# Altium PCB vi_measurement.PcbDoc
Units mil, origin at the board's own origin, x right, y up, seen from the top; angles counter-clockwise.
Board outline 3939.96 x 3937.01 mil, 2 copper layers (Top Layer, Bottom Layer); 149 components, 116 nets, 385 pads, 242 vias.
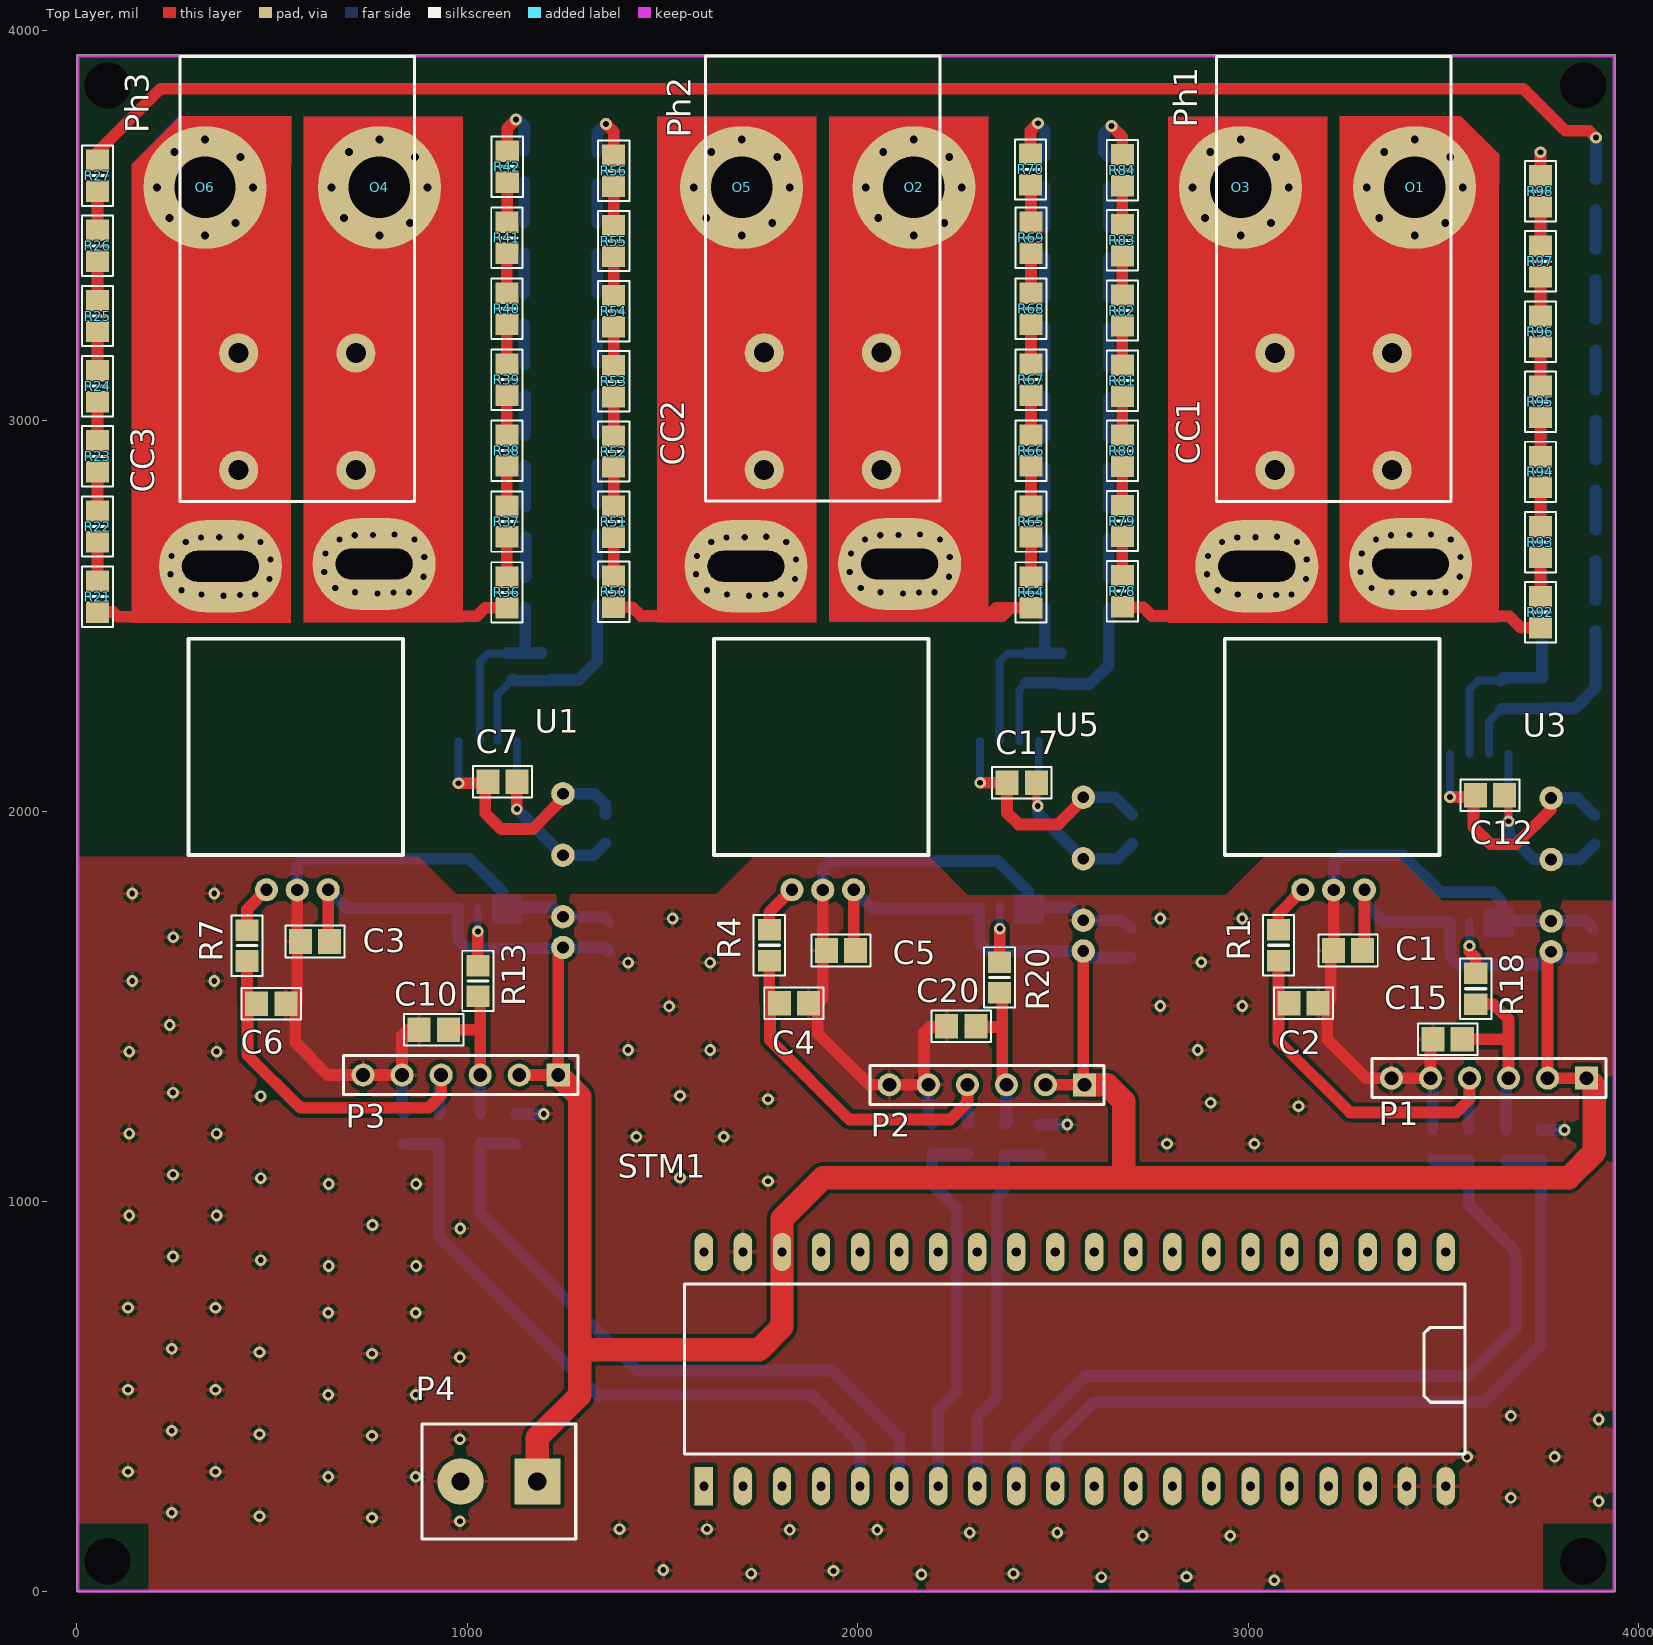
[diagram p0: Top Layer view]
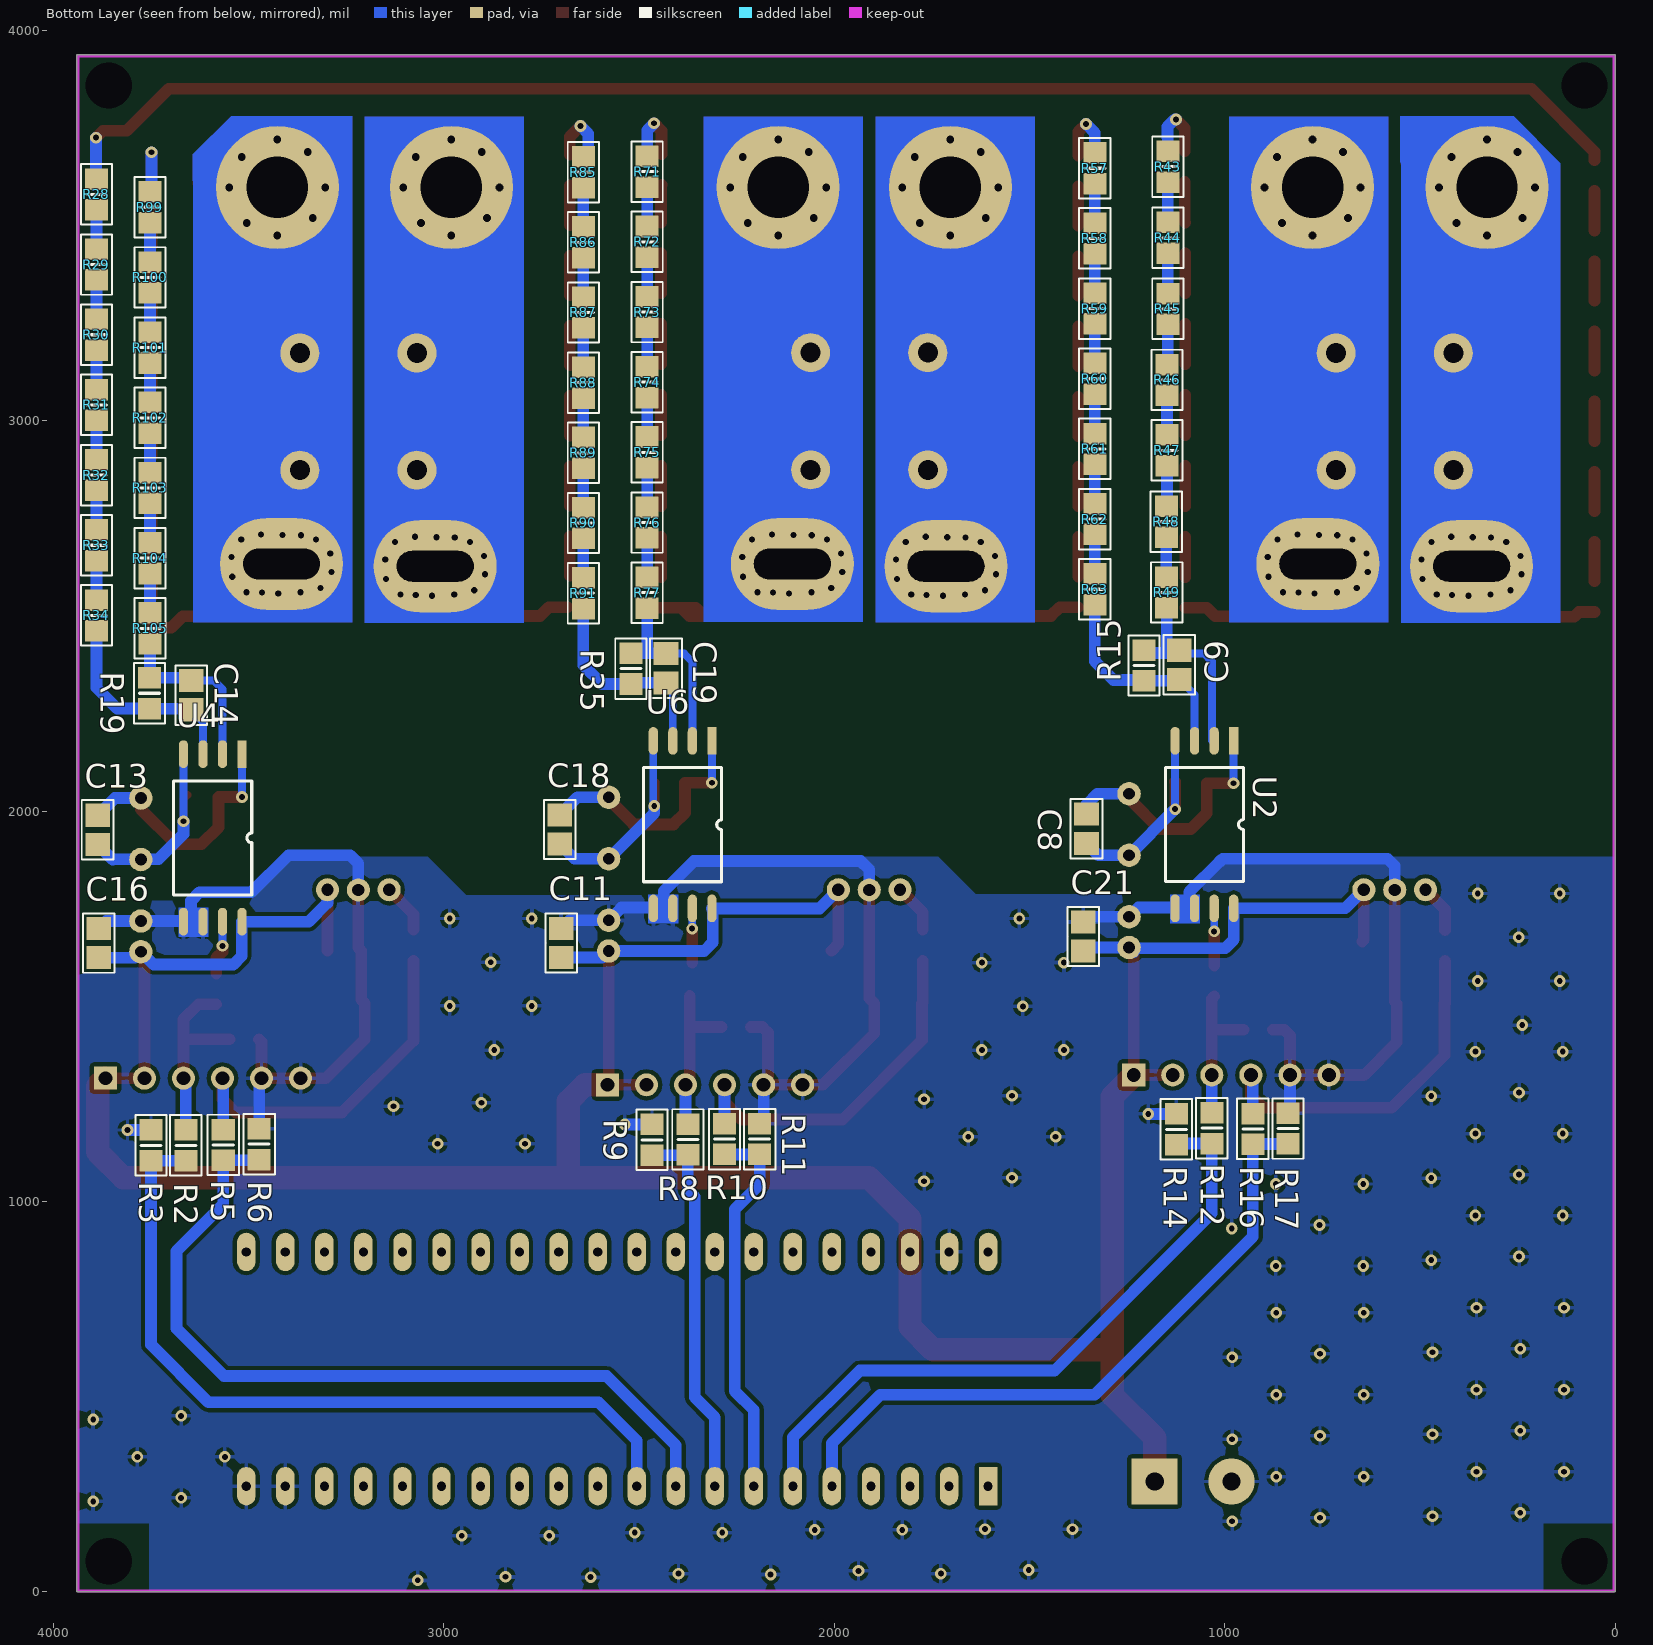
[diagram p1: Bottom Layer view, seen from below]

## Layer stack, top to bottom
Top Solder: solder mask 0.4, Solder Resist, Dk 3.5
Top Layer: signal copper 1.4
Dielectric 1: dielectric 12.6, FR-4, Dk 4.8
Bottom Layer: signal copper 1.4
Bottom Solder: solder mask 0.4, Solder Resist, Dk 3.5

## Board outline
0,0 3939.96,0 3939.96,3937.01 0,3937.01

## Design rules (kind name [scope] priority, off if disabled: settings)
Clearance [All] p1: gap=10 ignorepadtopadclearanceinfootprint=FALSE
PlaneClearance [All] p1: clearance=100
PolygonConnect [All] p1: connectstyle=Relief reliefconductorwidth=10 reliefentries=4 polygonreliefangle="90 Angle" airgapwidth=10
RoutingVias [All] p1: holewidth=28 width=50 viastyle="Through Hole" minholewidth=28 minwidth=50 maxholewidth=28 maxwidth=50
SilkToSilkClearance [All] p1: silktosilkclearance=1
SilkToSolderMaskClearance [IsPad] p1: minsilkscreentomaskgap=1 clearancetoexposedcopper=TRUE
SolderMaskExpansion [All] p1: expansion=4
Width [All] p1: maxlimit=150 minlimit=10 preferedwidth=30
27 further rules are at their usual default settings.

## Components (designator, comment, footprint, x,y, rotation, side; value= is the part's Value field where it differs from the comment)
C1 "" CAPC_0805 3256,1643 r0 top
C2 "" CAPC_0805 3141.69,1507.87 r0 top
C3 "" CAPC_0805 610,1666 r0 top
C4 "" CAPC_0805 1836.57,1507.87 r0 top
C5 "" CAPC_0805 1957,1643 r0 top
C6 "" CAPC_0805 497.99,1506.89 r0 top
C7 "Capacitor SMD" CAPC_0805 1090,2075 r180 top
C8 "Capacitor SMD" CAPC_0805 1354,1955 r90 bottom
C9 "Capacitor SMD" CAPC_0805 1116,2374.6 r270 bottom
C10 "Capacitor SMD" CAPC_0805 914,1440 r0 top
C11 "Capacitor SMD" CAPC_0805 2699,1662.4 r270 bottom
C12 "Capacitor SMD" CAPC_0805 3619.6,2041 r180 top
C13 "Capacitor SMD" CAPC_0805 3887,1952 r90 bottom
C14 "Capacitor SMD" CAPC_0805 3647,2297 r270 bottom
C15 "Capacitor SMD" CAPC_0805 3511,1416 r0 top
C16 "Capacitor SMD" CAPC_0805 3884,1662 r270 bottom
C17 "Capacitor SMD" CAPC_0805 2420,2073 r180 top
C18 "Capacitor SMD" CAPC_0805 2703,1953 r90 bottom
C19 "Capacitor SMD" CAPC_0805 2431,2366 r270 bottom
C20 "Capacitor SMD" CAPC_0805 2265,1449 r0 top
C21 "Capacitor SMD" CAPC_0805 1362,1679 r270 bottom
CC1 "ACS770" ACS770 3219.06,2215.55 r270 top
CC2 "ACS770" ACS770 1910.55,2215.55 r270 top
CC3 "ACS770" ACS770 564.53,2215.55 r270 top
O1 "olhal" Olhal 3426.57,3597.44 r0 top
O2 "olhal" Olhal 2143.66,3597.44 r0 top
O3 "olhal" Olhal 2980.71,3597.44 r0 top
O4 "olhal" Olhal 775,3597.44 r0 top
O5 "olhal" Olhal 1702.72,3597.44 r0 top
O6 "olhal" Olhal 328.15,3597.44 r0 top
P1 "Header 6" HDR1X6 3617,1316 r180 top
P2 "Header 6" HDR1X6 2331,1299 r180 top
P3 "Header 6" HDR1X6 983,1324 r180 top
P4 "gen_purpose_conn_1x2" connector1x2_parafuso 1081,283 r180 top
Ph1 "Phase" Phoenix 3069.06,3173.23 r0 top
Ph2 "Phase" Phoenix 1760.55,3174.21 r0 top
Ph3 "Phase" Phoenix 414.53,3173.23 r0 top
R1 "Resistor" RESC_0805 3077.72,1656.5 r270 top
R2 "Resistor" RESC_0805 3661,1144 r90 bottom
R3 "Resistor" RESC_0805 3750,1144 r270 bottom
R4 "Resistor" RESC_0805 1773.58,1656.5 r270 top
R5 "Resistor" RESC_0805 3565,1145 r90 bottom
R6 "Resistor" RESC_0805 3473,1147 r270 bottom
R7 "Resistor" RESC_0805 435.98,1655.51 r270 top
R8 "Resistor" RESC_0805 2375,1159 r90 bottom
R9 "Resistor" RESC_0805 2467,1158 r270 bottom
R10 "Resistor" RESC_0805 2281,1160 r90 bottom
R11 "Resistor" RESC_0805 2191,1160 r270 bottom
R12 "Resistor" RESC_0805 1033,1188 r90 bottom
R13 "Resistor" RESC_0805 1027,1565 r270 top
R14 "Resistor" RESC_0805 1124,1185 r270 bottom
R15 "R_MEAS" RESC_0805 1207,2373 r270 bottom
R16 "Resistor" RESC_0805 928,1186 r90 bottom
R17 "Resistor" RESC_0805 838,1187 r270 bottom
R18 "Resistor" RESC_0805 3583,1545 r270 top
R19 "R_MEAS" RESC_0805 3754,2302 r270 bottom
R20 "Resistor" RESC_0805 2363,1574 r270 top
R21 "Resistor" RESC_0805 53,2549.28 r90 top
R22 "Resistor" RESC_0805 53,2729.01 r90 top
R23 "Resistor" RESC_0805 53,2908.73 r90 top
R24 "Resistor" RESC_0805 53,3088.46 r90 top
R25 "Resistor" RESC_0805 53,3268.18 r90 top
R26 "Resistor" RESC_0805 53,3447.91 r90 top
R27 "Resistor" RESC_0805 53,3627.63 r90 top
R28 "Resistor" RESC_0805 3889.76,3579.65 r270 bottom
R29 "Resistor" RESC_0805 3889.76,3399.93 r270 bottom
R30 "Resistor" RESC_0805 3889.76,3220.2 r270 bottom
R31 "Resistor" RESC_0805 3889.76,3040.48 r270 bottom
R32 "Resistor" RESC_0805 3889.76,2860.76 r270 bottom
R33 "Resistor" RESC_0805 3889.76,2681.03 r270 bottom
R34 "Resistor" RESC_0805 3889.76,2501.31 r270 bottom
R35 "R_MEAS" RESC_0805 2521,2365 r270 bottom
R36 "Resistor" RESC_0805 1101.34,2560.04 r90 top
R37 "Resistor" RESC_0805 1101.34,2741.73 r90 top
R38 "Resistor" RESC_0805 1101.34,2923.42 r90 top
R39 "Resistor" RESC_0805 1101.34,3105.12 r90 top
R40 "Resistor" RESC_0805 1101.34,3286.81 r90 top
R41 "Resistor" RESC_0805 1101.34,3468.5 r90 top
R42 "Resistor" RESC_0805 1102.32,3650.59 r90 top
R43 "Resistor" RESC_0805 1145.63,3650.59 r270 bottom
R44 "Resistor" RESC_0805 1145.63,3468.5 r270 bottom
R45 "Resistor" RESC_0805 1145.63,3286.42 r270 bottom
R46 "Resistor" RESC_0805 1147.6,3104.33 r270 bottom
R47 "Resistor" RESC_0805 1147.6,2924.21 r270 bottom
R48 "Resistor" RESC_0805 1149.57,2741.14 r270 bottom
R49 "Resistor" RESC_0805 1148.58,2560.04 r270 bottom
R50 "Resistor" RESC_0805 1375,2561.65 r90 top
R51 "Resistor" RESC_0805 1375,2741.38 r90 top
R52 "Resistor" RESC_0805 1375,2921.1 r90 top
R53 "Resistor" RESC_0805 1375,3100.83 r90 top
R54 "Resistor" RESC_0805 1375,3280.55 r90 top
R55 "Resistor" RESC_0805 1375,3460.28 r90 top
R56 "Resistor" RESC_0805 1375,3640 r90 top
R57 "Resistor" RESC_0805 1332.76,3646.65 r270 bottom
R58 "Resistor" RESC_0805 1332.76,3466.93 r270 bottom
R59 "Resistor" RESC_0805 1332.76,3287.2 r270 bottom
R60 "Resistor" RESC_0805 1332.76,3107.48 r270 bottom
R61 "Resistor" RESC_0805 1332.76,2927.76 r270 bottom
R62 "Resistor" RESC_0805 1332.76,2748.03 r270 bottom
R63 "Resistor" RESC_0805 1332.76,2568.31 r270 bottom
R64 "Resistor" RESC_0805 2443.86,2560.04 r90 top
R65 "Resistor" RESC_0805 2443.86,2741.73 r90 top
R66 "Resistor" RESC_0805 2443.86,2923.43 r90 top
R67 "Resistor" RESC_0805 2443.86,3105.12 r90 top
R68 "Resistor" RESC_0805 2443.86,3286.81 r90 top
R69 "Resistor" RESC_0805 2443.86,3468.5 r90 top
R70 "Resistor" RESC_0805 2442.71,3643.47 r90 top
R71 "Resistor" RESC_0805 2479.29,3637.8 r270 bottom
R72 "Resistor" RESC_0805 2479.29,3458.07 r270 bottom
R73 "Resistor" RESC_0805 2479.29,3278.35 r270 bottom
R74 "Resistor" RESC_0805 2479.29,3098.62 r270 bottom
R75 "Resistor" RESC_0805 2479.29,2918.9 r270 bottom
R76 "Resistor" RESC_0805 2479.29,2739.17 r270 bottom
R77 "Resistor" RESC_0805 2479.29,2559.45 r270 bottom
R78 "Resistor" RESC_0805 2677.76,2563.35 r90 top
R79 "Resistor" RESC_0805 2677.76,2743.07 r90 top
R80 "Resistor" RESC_0805 2677.76,2922.8 r90 top
R81 "Resistor" RESC_0805 2677.76,3102.52 r90 top
R82 "Resistor" RESC_0805 2677.76,3282.24 r90 top
R83 "Resistor" RESC_0805 2677.76,3461.97 r90 top
R84 "Resistor" RESC_0805 2677.76,3641.69 r90 top
R85 "Resistor" RESC_0805 2642.76,3636.65 r270 bottom
R86 "Resistor" RESC_0805 2642.76,3456.93 r270 bottom
R87 "Resistor" RESC_0805 2642.76,3277.2 r270 bottom
R88 "Resistor" RESC_0805 2642.76,3097.48 r270 bottom
R89 "Resistor" RESC_0805 2642.76,2917.76 r270 bottom
R90 "Resistor" RESC_0805 2642.76,2738.03 r270 bottom
R91 "Resistor" RESC_0805 2642.76,2558.31 r270 bottom
R92 "Resistor" RESC_0805 3748.76,2509.35 r90 top
R93 "Resistor" RESC_0805 3748.76,2689.07 r90 top
R94 "Resistor" RESC_0805 3748.76,2868.8 r90 top
R95 "Resistor" RESC_0805 3748.76,3048.52 r90 top
R96 "Resistor" RESC_0805 3748.76,3228.24 r90 top
R97 "Resistor" RESC_0805 3748.76,3407.97 r90 top
R98 "Resistor" RESC_0805 3748.76,3587.69 r90 top
R99 "Resistor" RESC_0805 3752.76,3546.65 r270 bottom
R100 "Resistor" RESC_0805 3752.76,3366.93 r270 bottom
R101 "Resistor" RESC_0805 3752.76,3187.2 r270 bottom
R102 "Resistor" RESC_0805 3752.76,3007.48 r270 bottom
R103 "Resistor" RESC_0805 3752.76,2827.76 r270 bottom
R104 "Resistor" RESC_0805 3752.76,2648.03 r270 bottom
R105 "Resistor" RESC_0805 3752.76,2468.31 r270 bottom
STM1 "stm32" STM32 1606,271 r90 top
U1 "DC/DC_ISO" DC/DC_ISO 1245,1650.78 r90 top
U2 "AMC1200" SOIC8 977,2180.13 r270 bottom
U3 "DC/DC_ISO" DC/DC_ISO 3776,1639.78 r90 top
U4 "AMC1200" SOIC8 3517,2146 r270 bottom
U5 "DC/DC_ISO" DC/DC_ISO 2578,1641.78 r90 top
U6 "AMC1200" SOIC8 2313.5,2180 r270 bottom

## Footprints (in the part's own frame and the unit in brackets; to place one, negate y for a bottom-side part, rotate by r counter-clockwise, add the part's x,y. Pads: shape width x height; smd on the part's side, far side on the other; paste and mask are expansions set on the pad)
ACS770 [mm] "Connector; Header; 3 Position"
  round 1.5 hole 0.8: 1(10.592,2.007) 2(10.604,-0.002) 3(10.592,-2.007)
  oval 6x8 hole 2 slot 5 at 90 deg: 4(-10.605,5.002) 5(-10.456,-5.002)
  silkscreen extent -5.74,-7.09 8.33,6.88, body extent -11.23,-7.13 11.52,6.87, height 7.1
CAPC_0805 [mm] "Chip Capacitor, Body 2.0x1.3mm, IPC Low Density"
  rect 1.5x1.6 smd: 1(-0.95,0) 2(0.95,0)
  silkscreen extent -1.93,-1.03 1.93,1.03, body extent -1.1,-0.72 1.1,0.72, height 1.1
connector1x2_parafuso [mm] "Connector; Header; 2 Position"
  rect 3x3 hole 1.2: 1(-2.5,0)
  round 3 hole 1.2: 2(2.5,0)
  silkscreen extent -5,-3.75 5,3.75, body extent -4.92,-4.53 5.68,4.47, height 14.6
DC/DC_ISO [mil]
  round 60 hole 30: 1(0,0) 2(78.74,0) 3(236.22,0) 4(393.7,0)
  body extent -60,-150 517,81, height 315
HDR1X6 [mm] "Connector; Header; 6 Position"
  rect 1.5x1.5 hole 0.9: 1(-6.35,0)
  round 1.5 hole 0.9: 2(-3.81,0) 3(-1.27,0) 4(1.27,0) 5(3.81,0) 6(6.35,0)
  silkscreen extent -7.62,-1.27 7.62,1.27
Olhal [mm]
  round 8 hole 4 unplated: 1(0,0)
Phoenix [mm]
  round 2.54 hole 1.3: 1(0,-7.62) 1(0,0) 2(7.62,-7.62) 2(7.62,0)
  silkscreen extent -3.81,-9.65 11.43,19.3, body extent -3.79,-9.65 11.43,19.35, height 15.25
RESC_0805 [mm] "Chip Resistor, Body 2.0x1.3mm, IPC Low Density"
  rect 1.4x1.5 smd: 1(-1,0) 2(1,0)
  silkscreen extent -1.96,-1.01 1.96,1.01, body extent -1.07,-0.7 1.08,0.7, height 0.65
SOIC8 [mm]
  rect 1.8x0.6 smd: 1(0,0)
  oval 1.8x0.6 smd: 2(0,-1.27) 3(0,-2.54) 4(0,-3.81) 5(10.9,-3.81) 6(10.9,-2.54) 7(10.9,-1.27) 8(10.9,0)
  silkscreen extent 1.73,-4.45 9.17,0.63, body extent 1.7,-4.52 9.22,0.69, height 3
STM32 [mm]
  rect 2.5x1.2 hole 0.6: 1(0,0)
  oval 2.5x1.2 hole 0.6: 2(0,-2.54) 3(0,-5.08) 4(0,-7.62) 5(0,-10.16) 6(0,-12.7) 7(0,-15.24) 8(0,-17.78) 9(0,-20.32) 10(0,-22.86) 11(0,-25.4) 12(0,-27.94) 13(0,-30.48) 14(0,-33.02) 15(0,-35.56) 16(0,-38.1) 17(0,-40.64) 18(0,-43.18) 19(0,-45.72) 20(0,-48.26) 21(15.24,-48.26) 22(15.24,-45.72) 23(15.24,-43.18) 24(15.24,-40.64) 25(15.24,-38.1) 26(15.24,-35.56) 27(15.24,-33.02) 28(15.24,-30.48) 29(15.24,-27.94) 30(15.24,-25.4) 31(15.24,-22.86) 32(15.24,-20.32) 33(15.24,-17.78) 34(15.24,-15.24) 35(15.24,-12.7) 36(15.24,-10.16) 37(15.24,-7.62) 38(15.24,-5.08) 39(15.24,-2.54) 40(15.24,0)
  silkscreen extent 2.08,-49.53 13.16,1.27, body extent -3.7,-51.94 19.3,5.86, height 13.1

## Part data
C1 C3 C5: library part "Capacitor SMD", "10uF", LCSC=C337995
C2 C4 C6: library part "Capacitor SMD", "1uF", LCSC=C282734
C7 C8 C11 C12 C13 C16 C17 C18 C21: "10uF", LCSC=C337995
C9 C10 C14 C15 C19 C20: "1uF", LCSC=C282734
P1 P2 P3: "Header, 6-Pin", LatestRevisionDate=17-Jul-2002, LatestRevisionNote="Re-released for DXP Platform.", Publisher="Altium Limited"
Ph1 Ph2 Ph3: library part Phoenix
R1 R4 R7 R13 R18 R20: "330R", LCSC=C269732
R2 R5 R8 R10 R12 R16: "5K", LCSC=C105427
R3 R6 R9 R11 R14 R17 R21 R36 R37 R38 R39 R40 R41 R42 R43 R44 R45 R46 R47 R48 R49 R50 R51 R52 R53 R54 R55 R56 R57 R58 R59 R60 R61 R62 R63 R64 R65 R66 R67 R68 R69 R70 R71 R72 R73 R74 R75 R76 R77 R78 R79 R80 R81 R82 R83 R84 R85 R86 R87 R88 R89 R90 R91 R92 R93 R94 R95 R96 R97 R98 R99 R100 R101 R102 R103 R104 R105: "7K5", LCSC=C294739
R15 R19 R35: library part Resistor, "200R"
U1 U3 U5: LCSC=C98815
U2 U4 U6: LCSC=C79905

## Free pads (board coordinates)
  round 60 hole 118.11 unplated: 4(78.74,78.74) 4(78.74,3858.27) 4(3858.27,3858.27) 4(3858.27,78.74)

## Via types
v1: diameter 30, hole 15, Top Layer to Bottom Layer, 110 vias
v2: diameter 31.5, hole 15.75, Top Layer to Bottom Layer, 84 vias
v3: diameter 23.62, hole 19.68, Top Layer to Bottom Layer, 48 vias

## Nets (pads, with @x,y where several pads share a name; then routed paths per layer and width w, separated by ;. In a path a pad name is that pad's centre, name@x,y a point inside that pad or via, vN(x,y) a via of type N, cw(c..) or ccw(c..) an arc to the next point about the centre after c; other vN are vias at no path point)
A0: R16.1 R17.2 STM1.5 | length 1734.2
  Bottom Layer w30: R17.2 927,1147.63 R16.1 928,910 1333,505 1882,505 2006,381 STM1.5
A1: R12.1 R14.2 STM1.6 | length 1706.6
  Bottom Layer w30: R14.2 1121,1148.63 R12.1 1033,970 1436,567 1935,567 2106,396 STM1.6
A2: R10.1 R11.2 STM1.7 | length 986.1
  Bottom Layer w30: STM1.7 2206,466 2254.62,514.62 2254.62,980.38 2191,1044 R11.2 R10.1
A3: R8.1 R9.2 STM1.8 | length 969.6
  Bottom Layer w30: STM1.8 2306,447 2357.38,498.38 2357.38,1012.38 2375,1030 R8.1 2376,1118.63 R9.2
A4: R5.1 R6.2 STM1.9 | length 2081
  Bottom Layer w30: STM1.9 2406,376 2583,553 3563,553 3685,675 3685,873 3565,993 R5.1 3475,1105.63 R6.2
A5: R2.1 R3.2 STM1.10 | length 2023.1
  Bottom Layer w30: STM1.10 2506,388 2604,486 3603,486 3750,633 R3.2 R2.1
GND: C1.1 C2.2 C3.1 C4.2 C5.1 C6.2 C10.1 C11.1 C15.1 C16.1 C20.1 C21.1 CC1.2 CC2.2 CC3.2 P1.5 P1.6 P2.5 P2.6 P3.5 P3.6 P4.2 R3.1 R6.1 R9.1 R11.1 R14.1 R17.1 STM1.19 STM1.20 STM1.39 U1.2 U2.5 U2.6 U3.2 U4.5 U4.6 U5.2 U6.5 U6.6 | length 5828.3
  Top Layer w30: CC3.2 564.45,1512.33 559.02,1506.89 559.02,1407.98 643,1324 P3.6 P3.5 833,1426 847,1440 C10.1 ; CC2.2 1910.48,1520.75 1897.6,1507.87 1897.6,1430.4 2029,1299 P2.6 P2.5@2170,1299 ; P2.5 P2.5@2170,1299 ; C20.1@2213.6,1447 2184,1447 2170,1433 P2.5@2170,1299 ; CC1.2 3218.98,1650.12 3211.57,1642.72 3211.57,1516.73 3202.72,1507.87 3202.72,1415.28 3302,1316 P1.6 P1.5 3467,1409.4 C15.1
  Bottom Layer w30: CC3.2 564.45,1859.45 583,1878 1005,1878 1011,1872 1012,1872 1091,1793 1091,1763 1101,1753 1221.52,1753 U1.2 1348.88,1729.52 C21.1 ; P3.5 833,1231.37 R17.1 ; R14.1 v1(1195.63,1224.37) ; CC2.2 1910.48,1850.48 1932,1872 2360,1872 2437,1795 2437,1753 2545,1753 2577.48,1720.52 U5.2 2678.28,1720.52 C11.1 ; P2.5 2181,1209.37 R11.1 ; R9.1 v1(2536.63,1197.37) ; CC1.2 3218.98,1865.98 3240,1887 3398,1887 3493,1792 3626,1792 3647.52,1770.48 3647.52,1718.52 U3.2 3864.88,1718.52 C16.1 ; P1.5 3473,1310 R6.1 ; R3.1 v1(3810.37,1183.37)
  other v1: 3067,30 2624,38 2842,39 2163,45 1727,47 2399,47 1938,54 1502,56 2730,144 2954,144 2287,152 2511,152 1826,159 2050,159 1390,161 1614,161 981,181 756,190 468,194 243,203 3898,232 3673,241 644,295 868,295 131,308 355,308 3561,346 3785,346 981,391 756,400 468,404 243,413 3898,442 3673,451 644,505 868,505 131,518 355,518 981,601 756,610 468,614 243,623 644,715 868,715 131,728 355,728 645,835 869,835 471,850 246,859 982,931 757,940 134,964 358,964 645,1045 869,1045 1770,1052 471,1060 1545,1061 246,1069 2792,1148 3016,1148 1433,1166 1657,1166 134,1174 358,1174 3129,1244 2904,1253 1770,1262 471,1270 1545,1271 246,1279 134,1384 358,1384 1412,1388 1622,1388 2871,1388 238,1452 1517,1500 2775,1501 2985,1501 142,1565 352,1565 1412,1612 1622,1612 2880,1613 247,1677 1526,1725 2775,1725 2985,1725 142,1789 352,1789
Gnd1: C7.1 C8.1 U1.3 U2.4 | length 533.9
  Top Layer w30: v1(1127,2005) 1127,2074.6 C7.1
  Bottom Layer w20: U2.4 v1(1127,2005) v1@1130,2002
  Bottom Layer w30: v1@1130,2002 U1.3 1323.4,1887 C8.1
Gnd2: C12.1 C13.1 U3.3 U4.4 | length 539.1
  Top Layer w20: C12.1 3667,2031 v1(3667,1974)
  Bottom Layer w20: v1(3667,1974) U4.4
  Bottom Layer w30: v1(3667,1974) 3667,1941 3731,1877 3775,1877 U3.3 ; U3.3@3776.01,1876.7 3848.4,1876 C13.1
Gnd3: C17.1 C18.1 U5.3 U6.4 | length 553.6
  Top Layer w20: C17.1 2457.4,2016.6 v1(2461,2013)
  Bottom Layer w20: v1(2461,2013) 2463.5,2015.5 U6.4
  Bottom Layer w30: v1(2461,2013) 2461,1995 U5.3 2665.4,1878 C18.1
Iout1: C2.1 P1.4 R1.2 R5.2 | length 971.6
  Top Layer w30: R1.2 3077.72,1411.28 3261,1228 3533,1228 3567,1262 P1.4
  Bottom Layer w30: R5.2 3565,1314 P1.4
Iout2: C4.1 P2.4 R4.2 R10.2 | length 957.1
  Top Layer w30: R4.2 1773.58,1509.84 1775.55,1507.87 1775.55,1413.45 1979,1210 2237,1210 2281,1254 P2.4
  Bottom Layer w30: R10.2 P2.4
Iout3: C6.1 P3.4 R7.2 R16.2 | length 959.4
  Top Layer w30: R7.2 435.98,1507.87 436.97,1506.89 436.97,1375.03 572,1240 901,1240 933,1272 P3.4
  Bottom Layer w30: R16.2 928,1319 P3.4
NetCC1_3: CC1.3 R1.1 | length 128.5
  Top Layer w30: R1.1 3077.72,1736.21 CC1.3
NetCC2_3: CC2.3 R4.1 | length 126.7
  Top Layer w30: R4.1 1773.58,1740.58 CC2.3
NetCC3_3: CC3.3 R7.1 | length 124.2
  Top Layer w30: R7.1 435.98,1749.01 CC3.3
NetLabel7: CC3.5 O6.1 Ph3.1 R21.1 | length 125.9
  Top Layer w30: R21.1 93.09,2509.91 105,2498 174,2498
  other v2: 375.75,2551.63 318.75,2554.63 417.45,2553.78 456.75,2554.63 267.75,2565.63 493.75,2594.63 239.75,2606.63 495.75,2644.63 242.75,2653.63 278.75,2689.63 470.75,2689.63 317.75,2700.63 364.75,2701.63 419.75,2702.63
  other v3: 328.15,3474.44 406.15,3506.44 237.15,3519.44 205.15,3597.44 451.15,3597.44 419.15,3675.44 250.15,3688.44 328.15,3720.44
NetLabel8: CC3.4 O4.1 Ph3.2 R36.1 | length 160.5
  Top Layer w30: 949.76,2499.02 1024.57,2499.02 1046.22,2520.67 R36.1
  other v2: 769.6,2557.48 811.3,2559.63 712.6,2560.48 850.6,2560.48 661.6,2571.48 887.6,2600.48 633.6,2612.48 889.6,2650.48 636.6,2659.48 672.6,2695.48 864.6,2695.48 711.6,2706.48 758.6,2707.48 813.6,2708.48
  other v3: 775,3474.44 853,3506.44 684,3519.44 652,3597.44 898,3597.44 866,3675.44 697,3688.44 775,3720.44
NetLabel9: CC2.5 O5.1 Ph2.1 R50.1 | length 179.2
  Top Layer w30: R50.1 1422.72,2522.28 1445,2500 1545,2500
  other v2: 1721.78,2551.63 1664.78,2554.63 1763.48,2553.78 1802.78,2554.63 1613.78,2565.63 1839.78,2594.63 1585.78,2606.63 1841.78,2644.63 1588.78,2653.63 1624.78,2689.63 1816.78,2689.63 1663.78,2700.63 1710.78,2701.63 1765.78,2702.63
  other v3: 1702.72,3474.44 1780.72,3506.44 1611.72,3519.44 1579.72,3597.44 1825.72,3597.44 1793.72,3675.44 1624.72,3688.44 1702.72,3720.44
NetLabel10: CC2.4 O2.1 Ph2.2 R64.1 | length 321.1
  Top Layer w30: 2258.27,2499.02 2333.07,2499.02 2354.72,2520.67 2409.84,2520.67 ; 2295.79,2499.02 2370.59,2499.02 2392.24,2520.67 R64.1@2447.36,2520.67
  other v2: 2115.63,2557.48 2157.33,2559.63 2058.63,2560.48 2196.63,2560.48 2007.63,2571.48 2233.63,2600.48 1979.63,2612.48 2235.63,2650.48 1982.63,2659.48 2018.63,2695.48 2210.63,2695.48 2057.63,2706.48 2104.63,2707.48 2159.63,2708.48
  other v3: 2143.66,3474.44 2221.66,3506.44 2052.66,3519.44 2020.66,3597.44 2266.66,3597.44 2234.66,3675.44 2065.66,3688.44 2143.66,3720.44
NetLabel11: CC1.5 O3.1 Ph1.1 R78.1 | length 179.2
  Top Layer w30: R78.1@2683.5,2522.28 2731.22,2522.28 2753.5,2500 2853.5,2500
  other v2: 3030.28,2551.63 2973.28,2554.63 3071.98,2553.78 3111.28,2554.63 2922.28,2565.63 3148.28,2594.63 2894.28,2606.63 3150.28,2644.63 2897.28,2653.63 2933.28,2689.63 3125.28,2689.63 2972.28,2700.63 3019.28,2701.63 3074.28,2702.63
  other v3: 2980.71,3474.44 3058.71,3506.44 2889.71,3519.44 2857.71,3597.44 3103.71,3597.44 3071.71,3675.44 2902.71,3688.44 2980.71,3720.44
NetLabel12: CC1.4 O1.1 Ph1.2 R92.1 | length 147.8
  Top Layer w30: 3613,2499 3669,2499 3698.02,2469.98 R92.1
  other v2: 3424.13,2557.48 3465.83,2559.63 3367.13,2560.48 3505.13,2560.48 3316.13,2571.48 3542.13,2600.48 3288.13,2612.48 3544.13,2650.48 3291.13,2659.48 3327.13,2695.48 3519.13,2695.48 3366.13,2706.48 3413.13,2707.48 3468.13,2708.48
  other v3: 3426.57,3474.44 3504.57,3506.44 3335.57,3519.44 3303.57,3597.44 3549.57,3597.44 3517.57,3675.44 3348.57,3688.44 3426.57,3720.44
NetR13_1: R13.1 U2.7 | length 146.6
  Top Layer w30: R13.1 v1(1027,1692)
  Bottom Layer w20: v1(1027,1692) U2.7
NetR18_1: R18.1 U4.7 | length 139.1
  Top Layer w30: v1(3567,1655) 3567,1640 3583,1624 R18.1
  Bottom Layer w20: v1(3567,1655) U4.7
NetR20_1: R20.1 U6.7 | length 146.6
  Top Layer w30: R20.1@2364,1611.37 v1(2364,1699)
  Bottom Layer w20: v1(2364,1699) U6.7@2364,1758
NetR21_2: R21.2 R22.1 | length 101
  Top Layer w30: R21.2 R22.1
NetR22_2: R22.2 R23.1 | length 101
  Top Layer w30: R22.2 R23.1
NetR23_2: R23.2 R24.1 | length 101
  Top Layer w30: R23.2 R24.1
NetR24_2: R24.2 R25.1 | length 101
  Top Layer w30: R24.2 R25.1
NetR25_2: R25.2 R26.1 | length 101
  Top Layer w30: R25.2 R26.1
NetR26_2: R26.2 R27.1 | length 101
  Top Layer w30: R26.2 R27.1
NetR27_2: R27.2 R28.1 | length 4084.9
  Top Layer w30: R27.2 53,3688.82 214.18,3850 3705,3850 3812,3743 3873,3743 v1(3891,3725)
  Bottom Layer w30: R28.1 3891,3620.27 v1(3891,3725)
NetR28_2: R28.2 R29.1 | length 101
  Bottom Layer w30: R29.1 R28.2
NetR29_2: R29.2 R30.1 | length 101
  Bottom Layer w30: R30.1 R29.2
NetR30_2: R30.2 R31.1 | length 101
  Bottom Layer w30: R31.1 R30.2
NetR31_2: R31.2 R32.1 | length 101
  Bottom Layer w30: R32.1 R31.2
NetR32_2: R32.2 R33.1 | length 101
  Bottom Layer w30: R33.1 R32.2
NetR33_2: R33.2 R34.1 | length 101
  Bottom Layer w30: R34.1 R33.2
NetR36_2: R36.2 R37.1 | length 103
  Top Layer w30: R36.2 R37.1
NetR37_2: R37.2 R38.1 | length 103
  Top Layer w30: R37.2 R38.1
NetR38_2: R38.2 R39.1 | length 103
  Top Layer w30: R38.2 R39.1
NetR39_2: R39.2 R40.1 | length 103
  Top Layer w30: R39.2 R40.1
NetR40_2: R40.2 R41.1 | length 103
  Top Layer w30: R40.2 R41.1
NetR41_2: R41.2 R42.1 | length 103.8
  Top Layer w30: R41.2 1102.32,3508.86 R42.1
NetR42_2: R42.2 R43.1 | length 183.5
  Top Layer w30: R42.2 1102.32,3749.02 v1(1124.96,3771.65)
  Bottom Layer w30: v1(1124.96,3771.65) 1127.91,3771.65 1146.61,3752.95 R43.1
NetR43_2: R43.2 R44.1 | length 103.3
  Bottom Layer w30: R44.1 R43.2
NetR44_2: R44.2 R45.1 | length 103.3
  Bottom Layer w30: R45.1 R44.2
NetR45_2: R45.2 R46.1 | length 104.2
  Bottom Layer w30: R45.2 1145.63,3145.67 R46.1
NetR46_2: R46.2 R47.1 | length 101.4
  Bottom Layer w30: R47.1 R46.2
NetR47_2: R47.2 R48.1 | length 105.1
  Bottom Layer w30: R47.2 1147.6,2782.48 R48.1
NetR48_2: R48.2 R49.1 | length 102.8
  Bottom Layer w30: R49.1 1149.57,2600.39 R48.2
NetR50_2: R50.2 R51.1 | length 101
  Top Layer w30: R50.2 R51.1
NetR51_2: R51.2 R52.1 | length 101
  Top Layer w30: R51.2 R52.1
NetR52_2: R52.2 R53.1 | length 101
  Top Layer w30: R52.2 R53.1
NetR53_2: R53.2 R54.1 | length 101
  Top Layer w30: R53.2 R54.1
NetR54_2: R54.2 R55.1 | length 101
  Top Layer w30: R54.2 R55.1
NetR55_2: R55.2 R56.1 | length 101
  Top Layer w30: R55.2 R56.1
NetR56_2: R56.2 R57.1 | length 172.1
  Top Layer w30: v1(1355,3760) 1375,3740 R56.2
  Bottom Layer w30: R57.1 1332.76,3737.76 v1(1355,3760)
NetR57_2: R57.2 R58.1 | length 101
  Bottom Layer w30: R58.1 R57.2
NetR58_2: R58.2 R59.1 | length 101
  Bottom Layer w30: R59.1 R58.2
NetR59_2: R59.2 R60.1 | length 101
  Bottom Layer w30: R60.1 R59.2
NetR60_2: R60.2 R61.1 | length 101
  Bottom Layer w30: R61.1 R60.2
NetR61_2: R61.2 R62.1 | length 101
  Bottom Layer w30: R62.1 R61.2
NetR62_2: R62.2 R63.1 | length 101
  Bottom Layer w30: R63.1 R62.2
NetR64_2: R64.2 R65.1 | length 103
  Top Layer w30: R64.2 R65.1
NetR65_2: R65.2 R66.1 | length 103
  Top Layer w30: R65.2 R66.1
NetR66_2: R66.2 R67.1 | length 103
  Top Layer w30: R66.2 R67.1
NetR67_2: R67.2 R68.1 | length 103
  Top Layer w30: R67.2 R68.1
NetR68_2: R68.2 R69.1 | length 103
  Top Layer w30: R68.2 R69.1
NetR69_2: R69.2 R70.1 | length 96.7
  Top Layer w30: R70.1 2443.86,3602.95 R69.2
NetR70_2: R70.2 R71.1 | length 187.4
  Top Layer w30: R70.2@2448.78,3688.91 R70.2 2442.71,3742.94 v1(2461.57,3761.81)
  Bottom Layer w30: v1(2461.57,3761.81) 2479.29,3744.09 R71.1
NetR71_2: R71.2 R72.1 | length 101
  Bottom Layer w30: R72.1 R71.2
NetR72_2: R72.2 R73.1 | length 101
  Bottom Layer w30: R73.1 R72.2
NetR73_2: R73.2 R74.1 | length 101
  Bottom Layer w30: R74.1 R73.2
NetR74_2: R74.2 R75.1 | length 101
  Bottom Layer w30: R75.1 R74.2
NetR75_2: R75.2 R76.1 | length 101
  Bottom Layer w30: R76.1 R75.2
NetR76_2: R76.2 R77.1 | length 101
  Bottom Layer w30: R77.1 R76.2
NetR78_2: R78.2 R79.1 | length 101
  Top Layer w30: R78.2 R79.1
NetR79_2: R79.2 R80.1 | length 101
  Top Layer w30: R79.2 R80.1
NetR80_2: R80.2 R81.1 | length 101
  Top Layer w30: R80.2 R81.1
NetR81_2: R81.2 R82.1 | length 101
  Top Layer w30: R81.2 R82.1
NetR82_2: R82.2 R83.1 | length 101
  Top Layer w30: R82.2 R83.1
NetR83_2: R83.2 R84.1 | length 101
  Top Layer w30: R83.2 R84.1
NetR84_2: R84.2 R85.1 | length 178
  Top Layer w30: v1(2650,3755) 2677.76,3727.24 R84.2
  Bottom Layer w30: R85.1 2630,3688.78 2630,3735 v1(2650,3755)
NetR85_2: R85.2 R86.1 | length 101
  Bottom Layer w30: R86.1 R85.2
NetR86_2: R86.2 R87.1 | length 101
  Bottom Layer w30: R87.1 R86.2
NetR87_2: R87.2 R88.1 | length 101
  Bottom Layer w30: R88.1 R87.2
NetR88_2: R88.2 R89.1 | length 101
  Bottom Layer w30: R89.1 R88.2
NetR89_2: R89.2 R90.1 | length 101
  Bottom Layer w30: R90.1 R89.2
NetR90_2: R90.2 R91.1 | length 101
  Bottom Layer w30: R91.1 R90.2
NetR92_2: R92.2 R93.1 | length 101
  Top Layer w30: R92.2 R93.1
NetR93_2: R93.2 R94.1 | length 101
  Top Layer w30: R93.2 R94.1
NetR94_2: R94.2 R95.1 | length 101
  Top Layer w30: R94.2 R95.1
NetR95_2: R95.2 R96.1 | length 101
  Top Layer w30: R95.2 R96.1
NetR96_2: R96.2 R97.1 | length 101
  Top Layer w30: R96.2 R97.1
NetR97_2: R97.2 R98.1 | length 101
  Top Layer w30: R97.2 R98.1
NetR98_2: R98.2 R99.1 | length 164.1
  Top Layer w30: R98.2 v1(3748.76,3687.76)
  Bottom Layer w30: v1(3748.76,3687.76) 3748.76,3590.02 R99.1
NetR99_2: R99.2 R100.1 | length 101
  Bottom Layer w30: R100.1 R99.2
NetR100_2: R100.2 R101.1 | length 101
  Bottom Layer w30: R101.1 R100.2
NetR101_2: R101.2 R102.1 | length 101
  Bottom Layer w30: R102.1 R101.2
NetR102_2: R102.2 R103.1 | length 101
  Bottom Layer w30: R103.1 R102.2
NetR103_2: R103.2 R104.1 | length 101
  Bottom Layer w30: R104.1 R103.2
NetR104_2: R104.2 R105.1 | length 101
  Bottom Layer w30: R105.1 R104.2
Vamp1: C9.1 R15.1 R49.2 U2.2 | length 482.4
  Bottom Layer w20: U2.2@1032.8,2180.59 1032.8,2383.09 1053.69,2403.99 C9.1@1100.29,2403.99
  Bottom Layer w30: C9.1@1101.94,2404.96 R15.1@1190.29,2404.96 ; 1148.58,2405.3 R49.2
Vamp2: C9.2 R15.2 R63.2 U2.3 | length 552.6
  Bottom Layer w20: U2.3 1077,2298.2 C9.2
  Bottom Layer w30: C9.2 1119.57,2333.63 R15.2 ; R15.2@1211,2335.63 1284.63,2335.63 1332.76,2383.76 R63.2
Vamp3: C19.1 R35.1 R77.2 U6.2 | length 529.8
  Bottom Layer w20: U6.2 2363.5,2382.5 2384.4,2403.4 C19.1
  Bottom Layer w30: R77.2 2479.29,2404.71 2432.31,2404.71 2432.65,2404.37 R35.1
Vamp4: C19.2 R35.2 R91.2 U6.3 | length 533.9
  Bottom Layer w20: U6.3 2413.5,2311.1 C19.2
  Bottom Layer w30: C19.2 2518.03,2328.6 R35.2 2594.63,2325.63 2642.76,2373.76 R91.2
Vamp5: C14.1 R19.1 R105.2 U4.2 | length 453.2
  Bottom Layer w20: U4.2 3567,2312 3589.4,2334.4 C14.1
  Bottom Layer w30: C14.1 3653.97,2341.37 R19.1 3752.76,2342.61 R105.2
Vamp6: C14.2 R19.2 R34.2 U4.3 | length 538.4
  Bottom Layer w20: U4.3 3617,2229.6 C14.2
  Bottom Layer w30: C14.2 3649.72,2262.31 3754,2262.31 R19.2 3836.63,2262.63 3889.76,2315.76 R34.2
VCC: C1.2 C3.2 C5.2 C11.2 C16.2 C21.2 CC1.1 CC2.1 CC3.1 P1.1 P1.2 P2.1 P2.2 P3.1 P3.2 P4.1 STM1.38 U1.1 U2.8 U3.1 U4.8 U5.1 U6.8 | length 8764.3
  Top Layer w30: CC3.1 643.53,1669.87 C3.2 ; P3.2 P3.1 U1.1@1233,1638.78 ; CC2.1 1989.55,1660.02 C5.2@2006.85,1642.72 ; P2.2 P2.1 ; P2.1@2578,1302 U5.1 ; C1.2@3298.06,1643 CC1.1 ; U3.1 3767,1630.78 P1.2 P1.1
  Top Layer w60: P4.1 1179.43,395.43 1288,504 1288,620 ; P3.1 1288,1269 1288,620 ; P2.1 2639,1299 2681,1257 2681,1065 2685,1061 3821,1061 3887,1127 3887,1296 P1.1 ; 2677,1061 1911,1061 1806,956 STM1.38 1806,679 1747,620 1288,620
  Bottom Layer w30: CC3.1 691.08,1751 U2.8 977,1671 998.87,1649.13 U1.1@1243.35,1649.13 ; U1.1@1233,1638.78 U1.1@1243.35,1649.13 ; C21.2 1352.82,1650.78 U1.1 U1.1@1243.35,1649.13 ; CC2.1@1982.56,1791.56 CC2.1 2037.24,1750.87 U6.8 ; U6.8@2311.65,1743.65 2311.65,1663.65 2333.51,1641.78 U5.1 2594.78,1625 C11.2 ; P2.1@2578,1302 P2.1 ; CC1.1@3291.07,1791.56 CC1.1 3298.06,1764.94 3346.13,1716.87 U4.8 ; U4.8@3517.65,1708.87 3517.65,1628.87 3539.51,1607 3743.22,1607 U3.1 3791.18,1624.6 C16.2
Vdd1: C7.2 C8.2 U1.4 U2.1 | length 641.6
  Top Layer w30: v1(977.5,2071.5) 1046.1,2071.5 1046.1,1994.9 1087,1954 1167,1954 U1.4@1242,2029
  Bottom Layer w20: v1(977.5,2071.5) U2.1@977.5,2179
  Bottom Layer w30: U1.4 1326.48,2044.48 1354,2016.96 C8.2
Vdd2: C12.2 C13.2 U3.4 U4.1 | length 659.1
  Top Layer w30: v1(3517,2036) 3576.8,2036 3577,2035.8 3577,1959 3621,1915 3686,1915 3776,2005 U3.4
  Bottom Layer w20: v1(3517,2036) U4.1
  Bottom Layer w30: U3.4 3842.92,2033.48 C13.2
Vdd3: C17.2 C18.2 U5.4 U6.1 | length 636.6
  Top Layer w30: v1(2313.5,2072.5) 2382.1,2072.5 2382.1,1995.9 2412,1966 2514,1966 2578,2030 U5.4
  Bottom Layer w20: v1(2313.5,2072.5) U6.1
  Bottom Layer w30: U5.4 2657.92,2035.48 C18.2
Vout1: C15.2 P1.3 R2.2 R18.2 | length 506.4
  Top Layer w30: C15.2 3663,1416 3667,1420 ; R18.2 3628.37,1505.63 3667,1467 3667,1420 ; P1.3 3667,1420
  Bottom Layer w30: R2.2 3661,1310 P1.3
Vout2: C20.2 P2.3 R8.2 R20.2 | length 412.3
  Top Layer w30: C20.2@2288.4,1447 2370,1447 ; P2.3@2370,1299 R20.2@2370,1526.63
  Bottom Layer w30: R8.2 2381,1204.37 P2.3
Vout3: C10.2 P3.3 R12.2 R13.2 | length 390.8
  Top Layer w20: P3.3@1027,1330 P3.3
  Top Layer w30: C10.2 1033,1440 ; R13.2 1033,1519.63 1033,1440 ; P3.3 1033,1440
  Bottom Layer w30: R12.2 P3.3
pads on no net: STM1.1 STM1.2 STM1.3 STM1.4 STM1.11 STM1.12 STM1.13 STM1.14 STM1.15 STM1.16 STM1.17 STM1.18 STM1.21 STM1.22 STM1.23 STM1.24 STM1.25 STM1.26 STM1.27 STM1.28 STM1.29 STM1.30 STM1.31 STM1.32 STM1.33 STM1.34 STM1.35 STM1.36 STM1.37 STM1.40

## Polygon pours and split planes (outlines as drawn)
GND on Top Layer "Top Layer-No Net" (solid, remove dead copper, pour order 0): 0,176 0,1883 876,1883 972,1787 1638,1787 1734,1883 2184,1883 2282,1785 2943,1785 3041,1883 3385,1883 3497,1771 3939.96,1771 3939.96,176 3755,176 3755,0 184,0 184,176
GND on Bottom Layer "Top Layer-No Net" (solid, remove dead copper, pour order 2): 0,176 0,1883 994,1883 1090,1787 1638,1787 1734,1883 2337,1883 2435,1785 2943,1785 3041,1883 3385,1883 3497,1771 3939.96,1771 3939.96,176 3755,176 3755,0 184,0 184,176

## Keep-outs
Keep-Out Layer:
  lines w7.87: 3,3 3937,3 3937,3934 3,3934 3,3

## Other copper
Top Layer:
  region net NetLabel8: 988.58,3779.53 580.12,3779.53 580.12,2483.27 988.58,2483.27
  rectangle net NetLabel9: 1486.18,2483.27 1894.65,3779.53
  region net NetLabel10: 2334.61,3779.53 1926.14,3779.53 1926.14,2484.25 2334.61,2484.25
  region net NetLabel12: 3643.11,3605 3234.65,3605 3234.65,2483.27 3643.11,2483.27
  rectangle net NetLabel11: 2794.69,2482.28 3203.15,3779.53
  rectangle net NetLabel7: 140.16,2482.28 548.62,3655
  region net NetLabel12: 3234.65,3605 3234.65,3779.65 3235,3780 3545,3780 3643,3682 3643,3605
  region net NetLabel7: 140.16,3655 265.16,3780 548.62,3780 548.62,3655
Bottom Layer:
  rectangle net GND: 1063,1712 1140,1787
  rectangle net GND: 2399.5,1711.87 2476.5,1786.87
  rectangle net GND: 3603,1677.87 3680,1752.87
  region net NetLabel8: 988.58,3779.53 580.12,3779.53 580.12,2483.27 988.58,2483.27
  rectangle net NetLabel9: 1486.18,2483.27 1894.65,3779.53
  region net NetLabel10: 2334.61,3779.53 1926.14,3779.53 1926.14,2484.25 2334.61,2484.25
  rectangle net NetLabel11: 2794.69,2482.28 3203.15,3779.53
  region net NetLabel12: 3643.11,3615 3234.65,3615 3234.65,2483.27 3643.11,2483.27
  rectangle net NetLabel7: 140.16,2482.28 548.62,3660
  region net NetLabel12: 3234.65,3615 3235,3615.35 3235,3780 3545,3780 3643.11,3681.89 3643.11,3615
  region net NetLabel7: 140.16,3660 260.16,3780 550,3780 550,3661.38 548.62,3660

## Silkscreen, mask and mechanical layers (free items; w line width, h text height)
Mechanical 13:
  lines w7.87: 3,3 3,3934 3937,3934 3937,3 3,3